# EAGLE board SurgicalPCB (EAGLE 6.3)
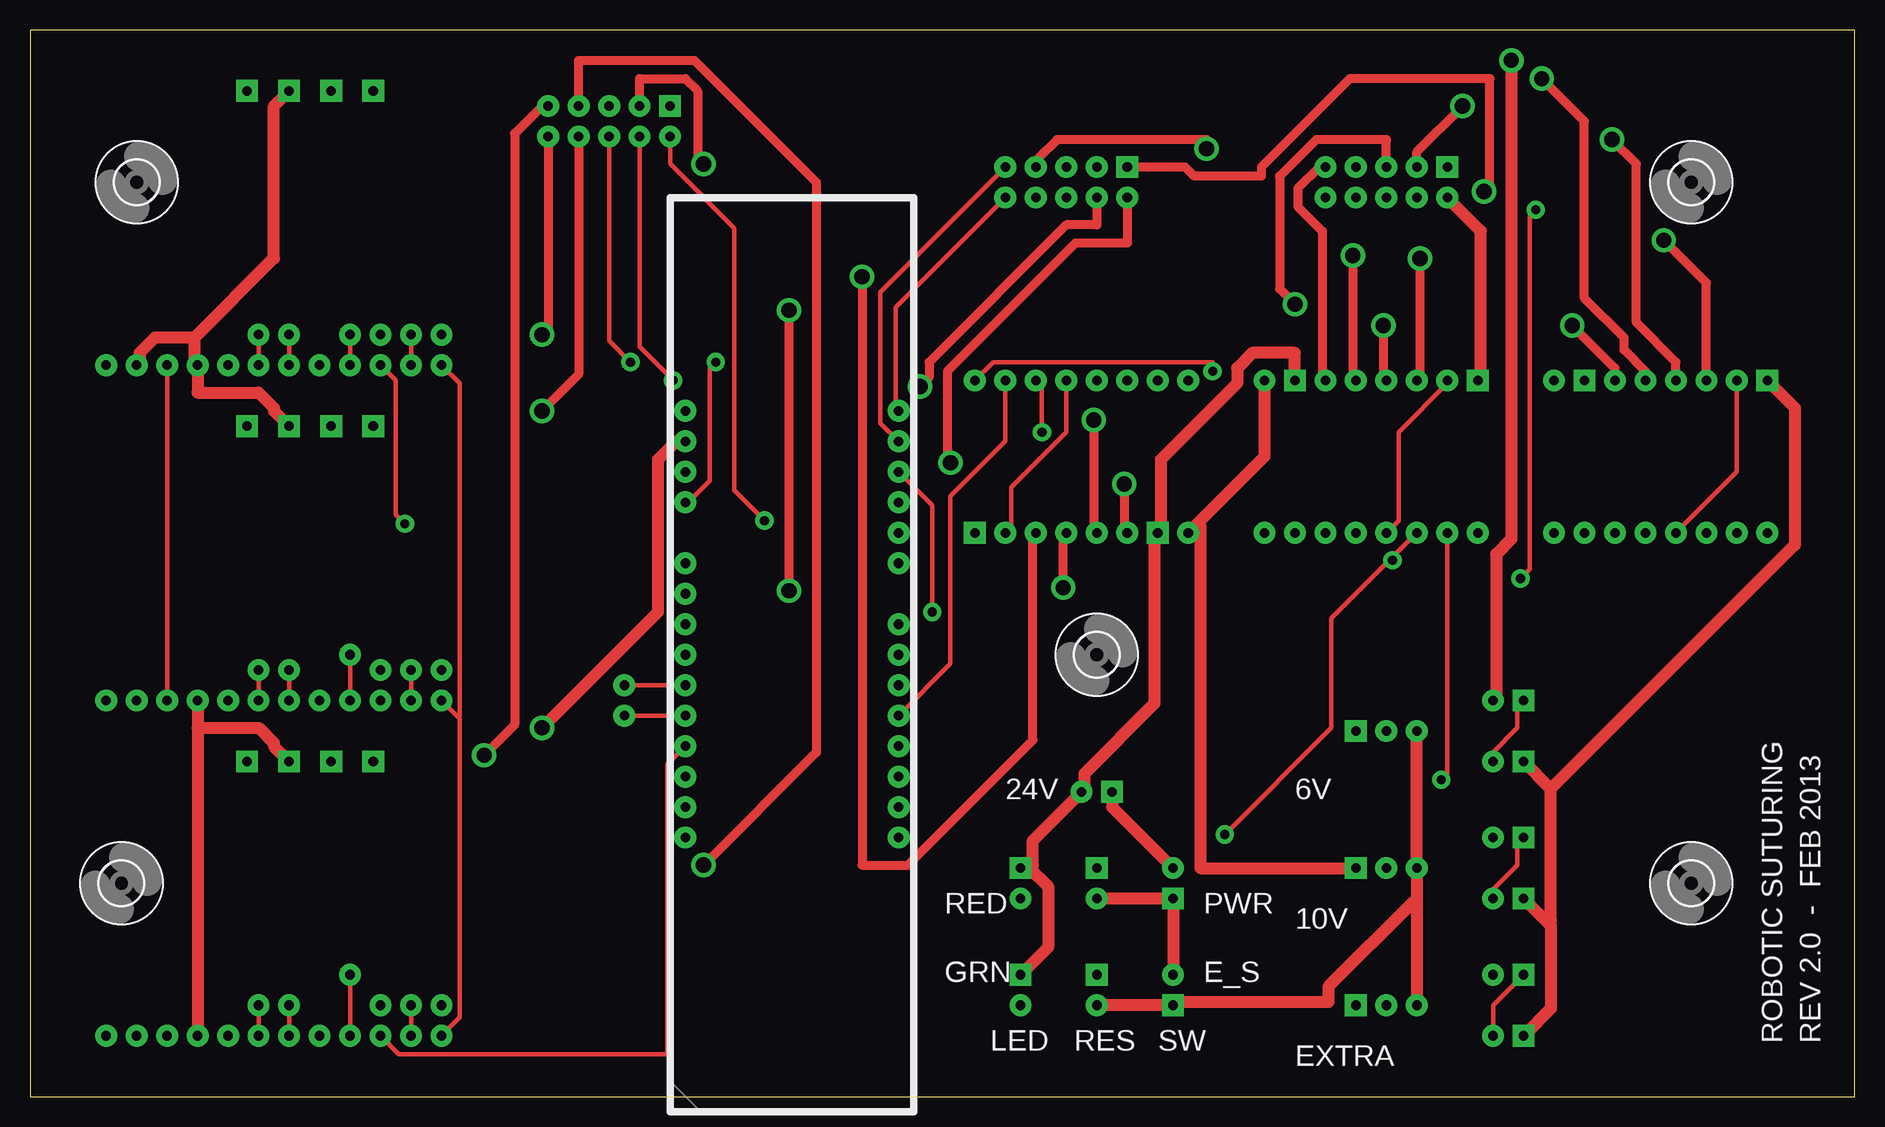
[diagram p0: board, top side]
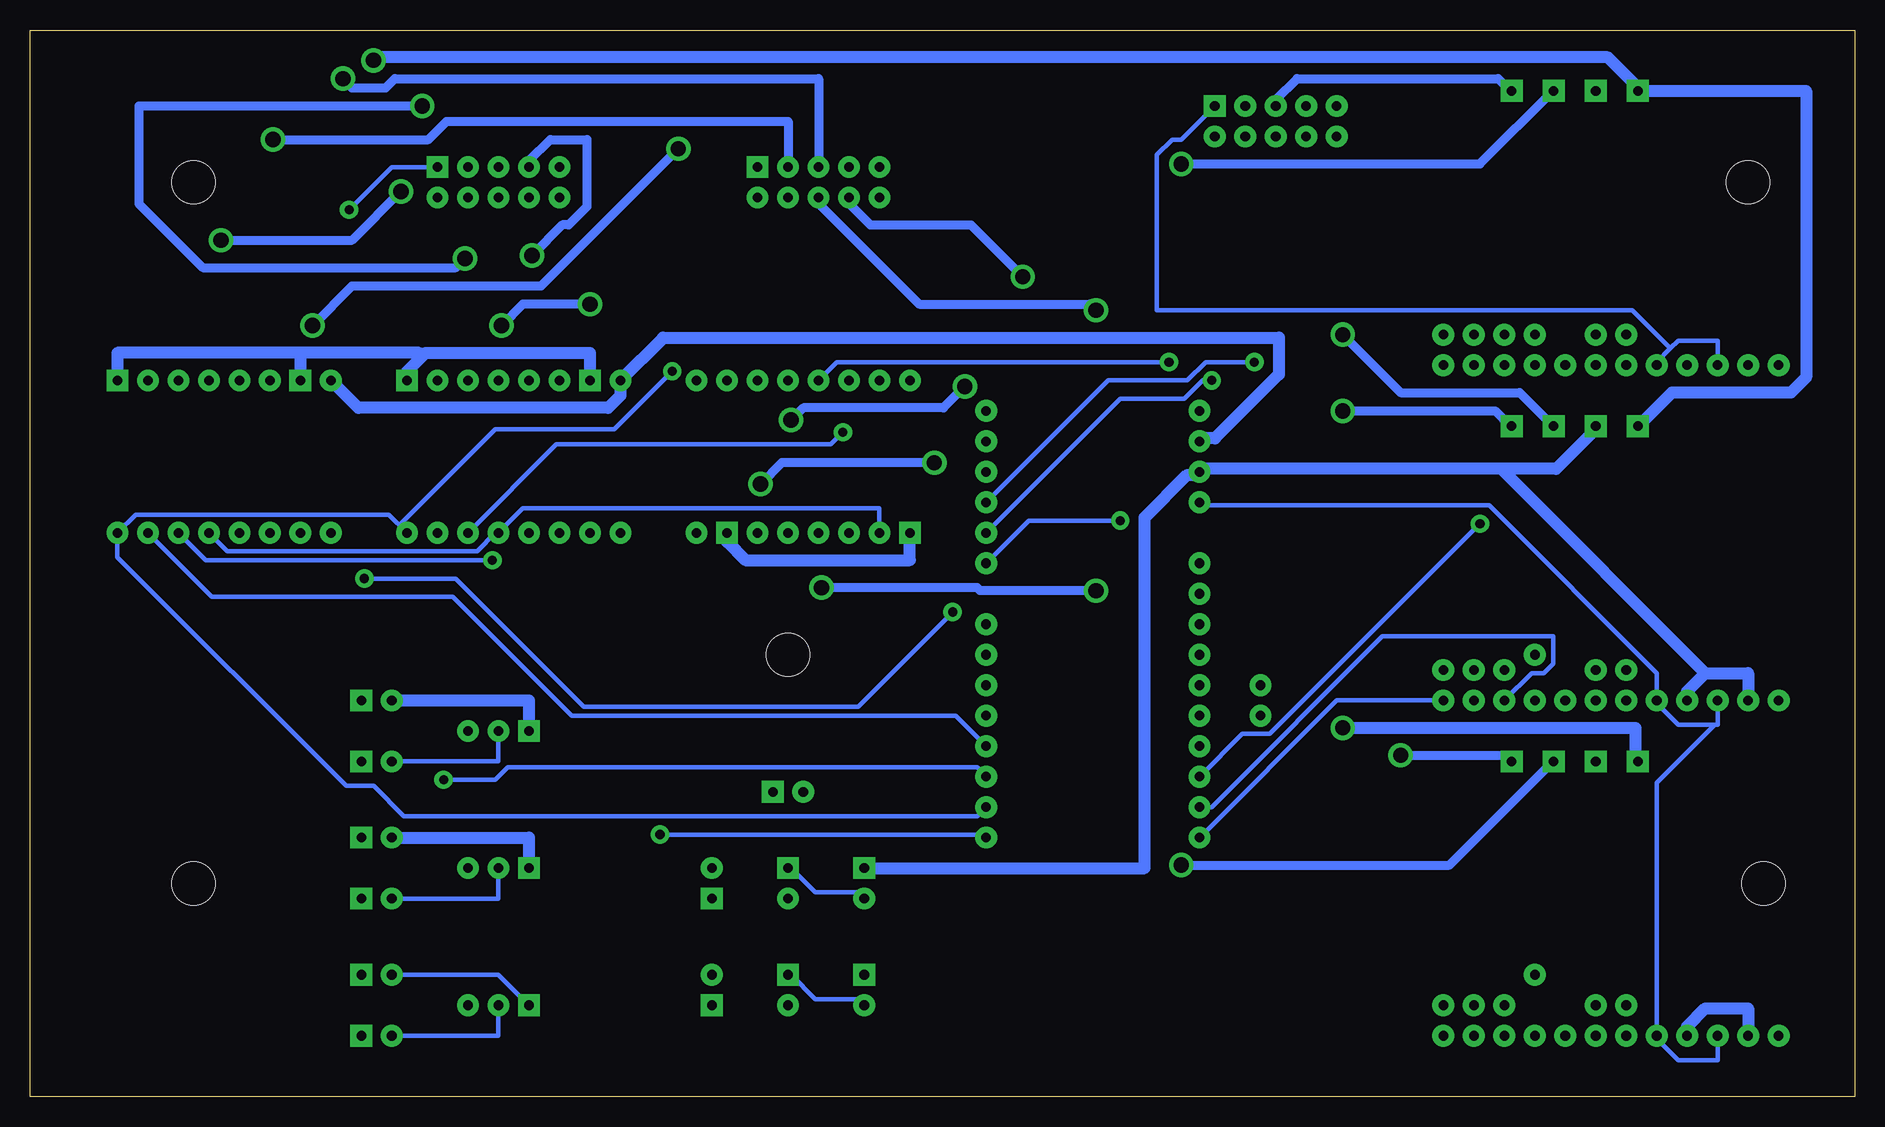
[diagram p1: board, bottom side, seen from below]

Size 152.07 x 88.89 mm. Coordinates in mm from the lower left corner, seen from the top.
Outline: 0,0 152.07,0 152.07,88.89 0,88.89 0,0
Copper layers (1*16): Top 0.035mm / dielectric 1.5mm / Bottom 0.035mm
Design rules "default *": minimum track width 15mil, minimum drill 10mil, track to track 15mil, track to pad 15mil, pad to pad 15mil, via to via 15mil, smd to smd 8mil, copper to edge 40mil, drill to drill 8mil, minimum pad ring 20mil, minimum via ring 15mil, stop-mask expansion 4mil, vias tented up to drill 0mil, thermal gap 10mil
Net classes: 0 default: width 0.381 mm, drill 0.762 mm, clearance 0.381 mm; 1 Power: width 1.016 mm, drill 1.27 mm, clearance 0.381 mm; 2 Motor: width 0.762 mm, drill 1.27 mm, clearance 0.381 mm

## Footprints (pad centres in the part's own frame; a part is rotated, then mirrored left to right if it is on the bottom)
V_REG = drill 0.8: ADJ 0,0; VIN 0,2.54 | drill 0.8 square: VOUT 0,-2.54
RESISTOR = drill 0.8: VIN 0,1.27 | drill 0.8 square: VOUT 0,-1.27
A4955 = drill 0.8: 1A 6.35,-1.27; 1B 6.35,-3.81; 2A 6.35,1.27; 2B 6.35,3.81; !EN -6.35,8.89; !RST -6.35,-1.27; !SLP -6.35,-3.81; DIT -6.35,-8.89; MS1 -6.35,6.35; MS2 -6.35,3.81; MS3 -6.35,1.27; STEP -6.35,-6.35; VDD 6.35,-6.35; VMOT 6.35,8.89 | drill 0.8 square: GND 6.35,6.35; GND_2 6.35,-8.89
BOARDUINO = drill 0.8: 5V 8.89,-2.54; 5V_2 8.89,-10.16; 10 -8.89,12.7; 11 -8.89,10.16; 12 -8.89,7.62; 13 -8.89,5.08; A0 -8.89,-5.08; A1 -8.89,-7.62; A2 -8.89,-10.16; A3 -8.89,-12.7; A4 -8.89,-15.24; A5 -8.89,-17.78; AREF -8.89,0; D2 8.89,5.08; D3 8.89,7.62; D4 8.89,10.16; D5 8.89,12.7; D6 8.89,15.24; D7 8.89,17.78; D8 -8.89,17.78; D9 -8.89,15.24; GND -8.89,2.54; GND_2 8.89,-5.08; GND_3 8.89,-12.7; RESET 8.89,-17.78; RX 8.89,0; TX 8.89,2.54; VIN 8.89,-15.24
MC33926 = drill 0.8: EN -11.43,-7.62; FB -11.43,-5.08; GND -11.43,12.7; IN1 -11.43,5.08; IN2 -11.43,7.62; INV -11.43,-12.7; JP_EN -8.89,-7.62; JP_INV -8.89,-12.7; JP_PWM/D1 -8.89,0; JP_PWM/D2 -8.89,2.54; JP_SLEW -8.89,-10.16; PWM/D1 -11.43,0; PWN/D2 -11.43,2.54; SF -11.43,-2.54; SLEW -11.43,-10.16; VDD -11.43,10.16; VIN -11.43,15.24 | drill 0.8 square: M_GND 11.43,0; M_OUT1 11.43,-7.01; M_OUT2 11.43,-3.505; M_VIN 11.43,3.505
2_5_RIBBON = drill 0.8 square: 1 -1.27,5.08 | drill 0.8: 2 1.27,5.08; 3 -1.27,2.54; 4 1.27,2.54; 5 -1.27,0; 6 1.27,0; 7 -1.27,-2.54; 8 1.27,-2.54; 9 -1.27,-5.08; 10 1.27,-5.08
3,6 = hole 3.6: 0,0
PROPE_HOLE = drill 0.8: P$1 0,0

## Placement (x,y rotation side)
6V  V_REG  [V_REG]  113.03,30.48 270 top
10V  V_REG  [V_REG]  113.03,19.05 270 top
E_STOP  RESISTOR  [RESISTOR]  95.25,8.89 0 top
EV  V_REG  [V_REG]  113.03,7.62 270 top
LED_GREEN  RESISTOR  [RESISTOR]  82.55,8.89 180 top
LED_R  RESISTOR  [RESISTOR]  82.55,17.78 180 top
LED_RES  RESISTOR  [RESISTOR]  88.9,17.78 180 top
LED_RES_G  RESISTOR  [RESISTOR]  88.9,8.89 180 top
POWER_SWITCH  RESISTOR  [RESISTOR]  95.25,17.78 0 top
POWERPLUG  RESISTOR  [RESISTOR]  88.9,25.4 90 top
RES6-1  RESISTOR  [RESISTOR]  123.19,33.02 90 top
RES_6-2  RESISTOR  [RESISTOR]  123.19,27.94 90 top
RES_10-1  RESISTOR  [RESISTOR]  123.19,21.59 90 top
RES_10-2  RESISTOR  [RESISTOR]  123.19,16.51 90 top
RES_EV-1  RESISTOR  [RESISTOR]  123.19,10.16 90 top
RES_EV-2  RESISTOR  [RESISTOR]  123.19,5.08 90 top
U$1  A4955  [A4955]  111.76,53.34 90 top
U$2  A4955  [A4955]  135.89,53.34 90 top
U$3  A4955  [A4955]  87.63,53.34 270 top
U$4  BOARDUINOSTD  [BOARDUINO]  63.5,39.37 180 top
U$5  MC33926  [MC33926]  21.59,44.45 90 top
U$6  MC33926  [MC33926]  21.59,72.39 90 top
U$7  MC33926  [MC33926]  21.59,16.51 90 top
U$8  2_5_RIBBON  [2_5_RIBBON]  48.26,81.28 270 top
U$9  2_5_RIBBON  [2_5_RIBBON]  113.03,76.2 270 top
U$10  2_5_RIBBON  [2_5_RIBBON]  86.36,76.2 270 top
U$11  [3,6]  8.89,76.2 0 top
U$13  [3,6]  7.62,17.78 0 top
U$14  PROPE_HOLE  [PROPE_HOLE]  26.67,10.16 0 top
U$15  [3,6]  138.43,17.78 0 top
U$16  [3,6]  138.43,76.2 0 top
U$17  [3,6]  88.9,36.83 0 top
U$23  PROPE_HOLE  [PROPE_HOLE]  26.67,63.5 0 top
U$24  PROPE_HOLE  [PROPE_HOLE]  26.67,36.83 0 top
U$25  PROPE_HOLE  [PROPE_HOLE]  49.53,31.75 0 top
U$26  PROPE_HOLE  [PROPE_HOLE]  49.53,34.29 0 top

## Library data of the parts
6V 10V E_STOP EV LED_GREEN LED_R LED_RES LED_RES_G POWER_SWITCH POWERPLUG RES6-1 RES_6-2 RES_10-1 RES_10-2 RES_EV-1 RES_EV-2 U$5-U$10 U$14 U$23-U$26 = SURGICALv2
U$1-U$3 = A4955
U$4 = SURGICAL
U$11 U$13 U$15-U$17 = holes

## Nets
6V_RAIL [Power]: 6V.VOUT RES6-1.VIN U$5.M_VIN U$6.M_VIN
10V_RAIL [Power]: 10V.VOUT RES_10-1.VIN U$1.VMOT U$2.VMOT U$3.VMOT U$4.VIN U$7.M_VIN
24V_1 [Power]: POWER_SWITCH.VIN POWERPLUG.VOUT
24V_2 [Power]: E_STOP.VIN LED_RES.VIN POWER_SWITCH.VOUT
24V_3: LED_R.VIN LED_RES.VOUT
24V_4 [Power]: 6V.VIN 10V.VIN E_STOP.VOUT EV.VIN LED_RES_G.VIN
24V_5: LED_GREEN.VIN LED_RES_G.VOUT
GND [Power]: LED_GREEN.VOUT LED_R.VOUT POWERPLUG.VIN RES_6-2.VOUT RES_10-2.VOUT RES_EV-2.VOUT U$1.GND U$1.GND_2 U$2.GND U$2.GND_2 U$3.GND U$3.GND_2 U$4.GND_3 U$5.GND U$5.IN2 U$5.M_GND U$6.GND U$6.IN2 U$6.M_GND U$7.GND U$7.IN2 U$7.M_GND U$9.2
LOGIC_HIGH_RAIL: U$1.!RST U$1.VDD U$2.!RST U$2.VDD U$3.!RST U$3.VDD U$4.5V_2 U$5.IN1 U$5.VDD U$6.IN1 U$6.VDD U$7.IN1 U$7.VDD U$8.1
N$1: U$3.STEP U$4.12
N$2: U$1.!SLP U$2.!SLP U$3.!SLP U$4.D8
N$3: U$1.DIT U$2.DIT U$3.DIT U$4.D9
N$4: U$1.STEP U$4.10
N$5: U$2.STEP U$4.11
N$6: U$7.FB U$14.P$1
N$7: U$6.FB U$23.P$1
N$9: U$5.JP_PWM/D2 U$5.PWN/D2
N$10: U$5.JP_PWM/D1 U$5.PWM/D1
N$11: U$5.JP_SLEW U$5.SLEW
N$12: U$5.FB U$24.P$1
N$13: U$4.D3 U$25.P$1
N$14: U$6.JP_PWM/D2 U$6.PWN/D2
N$15: U$6.JP_PWM/D1 U$6.PWM/D1
N$16: U$6.JP_SLEW U$6.SLEW
N$17: U$4.D2 U$26.P$1
N$19: U$7.JP_PWM/D2 U$7.PWN/D2
N$20: U$7.JP_PWM/D1 U$7.PWM/D1
N$21: U$7.JP_SLEW U$7.SLEW
N$22: U$4.D7 U$5.INV U$6.INV U$7.INV
N$23 [Motor]: U$5.M_OUT2 U$8.10
N$24: U$4.D6 U$5.EN
N$25: U$4.D5 U$6.EN
N$26: U$4.D4 U$7.EN
N$27 [Motor]: U$5.M_OUT1 U$8.8
N$28 [Motor]: U$6.M_OUT2 U$8.3
N$29 [Motor]: U$6.M_OUT1 U$8.5
N$30 [Motor]: U$7.M_OUT2 U$8.7
N$31 [Motor]: U$7.M_OUT1 U$8.9
N$32: U$4.A2 U$8.6
N$33: U$4.A1 U$8.4
N$34: U$4.A0 U$8.2
N$35 [Motor]: U$3.2B U$10.2
N$36 [Motor]: U$3.2A U$10.4
N$37 [Motor]: U$3.1A U$10.6
N$38 [Motor]: U$3.1B U$10.8
N$39: U$4.A5 U$10.10
N$40 [Motor]: U$2.1B U$10.1
N$41 [Motor]: U$2.1A U$10.3
N$42 [Motor]: U$2.2A U$10.5
N$43 [Motor]: U$2.2B U$10.7
N$44: U$4.A4 U$10.9
N$45 [Motor]: U$1.2B U$9.9
N$46 [Motor]: U$1.2A U$9.7
N$47 [Motor]: U$1.1A U$9.5
N$48 [Motor]: U$1.1B U$9.3
N$49: U$4.A3 U$9.1
N$52: 10V.ADJ RES_10-1.VOUT RES_10-2.VIN
N$60: 6V.ADJ RES6-1.VOUT RES_6-2.VIN
N$64: EV.VOUT RES_EV-1.VIN
N$65: EV.ADJ RES_EV-1.VOUT RES_EV-2.VIN

## Tracks (layer width: path | path; a pad name or v marks a point on that pad's centre or on a via)
6V_RAIL  (via drill 1.27)
  Top 1.016: RES6-1.VIN 122.17,33.27 122.17,45.21 123.44,46.48 v123.44,86.36
  Bottom 1.016: 6V.VOUT 110.49,33.02 RES6-1.VIN | U$5.M_VIN 18.03,55.88 15.24,58.67 5.33,58.67 4.06,59.94 4.06,83.82 U$6.M_VIN 18.03,84.07 20.57,86.61 123.19,86.61 v123.44,86.36
10V_RAIL  (via drill 1.27)
  Top 1.016: v42.67,30.73 52.32,40.39 52.32,53.09 53.85,54.61 U$4.VIN | 97.28,47.75 102.87,53.34 U$1.VMOT | 97.28,47.75 U$3.VMOT | 10V.VOUT 97.54,19.05 97.54,47.5 97.28,47.75
  Bottom 1.016: v42.67,30.73 18.29,30.73 18.29,27.94 U$7.M_VIN | 10V.VOUT 110.49,21.59 RES_10-1.VIN | U$2.VMOT 124.71,57.4 103.89,57.4 102.87,58.42 U$1.VMOT 99.31,63.25 48.01,63.25 48.01,60.2 53.34,54.86 54.36,54.86 U$4.VIN
24V_1
  Top 1.016: POWER_SWITCH.VIN 90.17,24.13 POWERPLUG.VOUT
24V_2
  Top 1.016: E_STOP.VIN POWER_SWITCH.VOUT LED_RES.VIN
24V_3
  Bottom 0.381: LED_R.VIN 83.06,17.02 86.61,17.02 88.65,19.05 LED_RES.VOUT
24V_4
  Top 1.016: LED_RES_G.VIN E_STOP.VOUT 95.5,7.87 108.2,7.87 108.2,9.14 115.32,16.26 115.57,16.26 | 115.57,16.26 10V.VIN 6V.VIN | 115.57,16.26 EV.VIN
24V_5
  Bottom 0.381: LED_GREEN.VIN 83.06,8.13 86.61,8.13 88.65,10.16 LED_RES_G.VOUT
GND
  Top 1.016: U$7.M_GND 20.32,29.21 20.32,29.46 19.05,30.73 13.97,30.73 | U$5.IN2 13.97,30.73 | 13.97,30.73 U$7.IN2 | U$5.M_GND 20.32,57.15 20.32,57.4 19.05,58.67 13.97,58.67 U$6.IN2 13.72,61.21 13.72,63.25 | U$6.GND 9.14,61.21 9.14,61.98 10.41,63.25 13.72,63.25 | U$6.M_GND 20.32,82.55 20.32,69.85 13.72,63.25 | LED_GREEN.VOUT 84.84,12.45 84.84,17.53 83.31,19.05 | LED_R.VOUT 83.31,19.05 | 83.31,19.05 83.57,19.3 83.57,21.34 POWERPLUG.VIN 87.88,25.65 87.88,26.92 93.73,32.77 93.73,46.74 U$3.GND 94.23,47.24 94.23,53.09 100.58,59.44 100.58,60.71 101.85,61.98 105.41,61.98 U$1.GND | RES_EV-2.VOUT 126.75,7.37 126.75,14.22 126.49,14.48 | RES_10-2.VOUT 126.49,14.48 | 126.75,25.65 RES_6-2.VOUT | 126.75,25.65 126.75,14.73 126.49,14.48 | U$9.2 120.9,72.14 120.9,59.94 U$1.GND_2 | 126.75,25.65 147.07,45.97 147.07,57.4 U$2.GND_2
  Bottom 1.016: U$7.GND 8.89,7.37 12.45,7.37 13.97,5.84 U$7.IN2 | U$5.GND 8.89,35.31 12.45,35.31 | 12.45,35.31 13.97,33.78 U$5.IN2 | 29.21,52.32 24.89,52.32 21.59,55.63 U$5.M_GND | 29.21,52.32 54.36,52.32 U$4.GND_3 54.86,51.82 55.63,51.82 59.18,48.26 59.18,19.05 LED_R.VOUT | 12.45,35.31 29.21,52.07 29.21,52.32 | U$3.GND_2 78.74,44.7 92.46,44.7 93.98,46.23 U$3.GND | U$1.GND 105.41,61.98 119.13,61.98 119.38,61.72 | 119.38,61.72 120.65,60.45 U$1.GND_2 | 129.54,61.98 U$2.GND | 129.54,61.98 119.63,61.98 119.38,61.72 | U$2.GND_2 144.78,61.98 129.54,61.98
LOGIC_HIGH_RAIL  (via drill 0.76)
  Top 0.381: U$2.!RST 142.24,52.07 U$2.VDD | U$3.VDD 81.79,47.5 81.79,50.8 86.36,55.37 U$3.!RST | U$1.!RST 114.05,48.01 114.05,55.37 118.11,59.44 U$1.VDD | U$5.VDD U$6.VDD | v57.15,61.21 56.64,60.71 56.64,51.31 54.86,49.53 U$4.5V_2
  Bottom 0.381: U$3.VDD 81.28,49.02 111,49.02 U$1.!RST 113.28,46.99 114.81,45.47 135.64,45.47 U$2.!RST | U$6.VDD 11.43,62.99 14.73,62.99 15.37,62.36 | 15.37,62.36 16.51,61.21 U$6.IN1 | U$8.1 56.13,79.76 56.9,79.76 58.17,78.49 58.17,65.53 18.54,65.53 15.37,62.36 | U$7.VDD 11.43,3.05 14.73,3.05 16.51,4.83 U$7.IN1 16.51,26.16 11.68,30.99 | U$5.VDD 11.43,30.99 11.68,30.99 | 11.68,30.99 14.73,30.99 16.51,32.77 U$5.IN1 16.51,35.31 30.48,49.28 54.36,49.28 U$4.5V_2 | U$3.!RST 84.84,61.21 v57.15,61.21
N$1
  Top 0.381: U$4.12 76.71,36.07 76.71,50.04 81.28,54.61 U$3.STEP
N$2  (via drill 0.76)
  Top 0.381: v99.57,21.84 108.46,30.73 108.46,39.88 113.41,44.83 | U$1.!SLP 113.41,44.83 | U$3.!SLP 84.33,59.18 v84.33,55.37 | v113.54,44.7 113.41,44.83
  Bottom 0.381: U$4.D8 72.64,21.84 v99.57,21.84 | v84.33,55.37 85.34,54.36 108.2,54.36 U$1.!SLP | U$2.!SLP 137.41,44.7 v113.54,44.7
N$3  (via drill 0.76)
  Top 0.381: U$3.DIT 80.26,61.21 98.55,61.21 v98.55,60.45
  Bottom 0.381: U$4.D9 73.15,23.37 120.9,23.37 123.44,25.91 125.73,25.91 144.78,44.96 U$2.DIT 143.26,48.51 122.17,48.51 U$1.DIT 121.16,47.75 113.28,55.63 103.38,55.63 v98.55,60.45
N$4  (via drill 0.76)
  Top 0.381: v117.6,26.42 118.11,26.92 U$1.STEP
  Bottom 0.381: U$4.10 73.15,27.43 112.27,27.43 113.28,26.42 v117.6,26.42
N$5
  Bottom 0.381: U$4.11 74.93,31.75 106.93,31.75 116.84,41.66 136.91,41.66 U$2.STEP
N$6
  Top 0.381: U$14.P$1 U$7.FB
N$7
  Top 0.381: U$23.P$1 U$6.FB
N$9
  Top 0.381: U$5.JP_PWM/D2 U$5.PWN/D2
N$10
  Top 0.381: U$5.JP_PWM/D1 U$5.PWM/D1
N$11
  Top 0.381: U$5.JP_SLEW U$5.SLEW
N$12
  Top 0.381: U$24.P$1 U$5.FB
N$13
  Top 0.381: U$4.D3 U$25.P$1
N$14
  Top 0.381: U$6.JP_PWM/D2 U$6.PWN/D2
N$15
  Top 0.381: U$6.JP_PWM/D1 U$6.PWM/D1
N$16
  Top 0.381: U$6.JP_SLEW U$6.SLEW
N$17
  Top 0.381: U$4.D2 U$26.P$1
N$19
  Top 0.381: U$7.JP_PWM/D2 U$7.PWN/D2
N$20
  Top 0.381: U$7.JP_PWM/D1 U$7.PWM/D1
N$21
  Top 0.381: U$7.JP_SLEW U$7.SLEW
N$22
  Top 0.381: U$7.INV 35.81,6.6 35.81,31.5 35.69,31.62 | U$5.INV 35.69,31.62 | U$6.INV 35.81,59.44 35.81,31.75 35.69,31.62
  Bottom 0.381: U$4.D7 43.18,33.02 U$5.INV
N$23  (via drill 1.27)
  Top 0.762: v42.67,63.5 43.18,64.01 U$8.10
  Bottom 0.762: v42.67,63.5 37.85,58.67 27.94,58.67 25.15,55.88 U$5.M_OUT2
N$24
  Bottom 0.381: U$5.EN 26.92,35.31 25.91,35.31 25.15,36.07 25.15,38.35 39.37,38.35 53.59,24.13 U$4.D6
N$25  (via drill 0.76)
  Top 0.381: v31.24,47.75 30.48,48.51 30.48,59.69 U$6.EN
  Bottom 0.381: U$4.D5 51.05,30.23 48.77,30.23 v31.24,47.75
N$26
  Top 0.381: U$7.EN 30.73,3.56 53.09,3.56 53.09,27.69 U$4.D4
N$27  (via drill 1.27)
  Top 0.762: v42.67,57.15 45.72,60.2 U$8.8
  Bottom 0.762: v42.67,57.15 29.97,57.15 28.7,55.88 U$5.M_OUT1
N$28  (via drill 1.27)
  Top 0.762: v56.13,77.72 55.63,78.23 55.63,83.82 54.61,84.84 50.8,84.84 U$8.3
  Bottom 0.762: v56.13,77.72 31.24,77.72 25.15,83.82 U$6.M_OUT2
N$29
  Bottom 0.762: U$8.5 48.26,83.06 46.48,84.84 29.72,84.84 28.7,83.82 U$6.M_OUT1
N$30  (via drill 1.27)
  Top 0.762: v56.13,19.3 65.53,28.7 65.53,76.2 55.37,86.36 45.72,86.36 U$8.7
  Bottom 0.762: v56.13,19.3 33.78,19.3 25.15,27.94 U$7.M_OUT2
N$31  (via drill 1.27)
  Top 0.762: v37.85,28.45 40.39,30.99 40.39,80.26 42.67,82.55 U$8.9
  Bottom 0.762: v37.85,28.45 29.21,28.45 28.7,27.94 U$7.M_OUT1
N$32  (via drill 0.76)
  Top 0.381: v50.04,61.21 48.26,62.99 U$8.6
  Bottom 0.381: U$4.A2 62.23,59.69 55.63,59.69 54.1,61.21 v50.04,61.21
N$33  (via drill 0.76)
  Top 0.381: v53.59,59.69 50.8,62.48 U$8.4
  Bottom 0.381: U$4.A1 61.21,58.17 55.88,58.17 54.36,59.69 v53.59,59.69
N$34  (via drill 0.76)
  Top 0.381: v61.21,48.01 58.67,50.55 58.67,72.39 53.34,77.72 U$8.2
  Bottom 0.381: U$4.A0 68.83,48.01 v61.21,48.01
N$35  (via drill 1.27)
  Top 0.762: U$3.2B 91.19,47.24 v91.19,51.05 | v76.71,52.83 76.45,53.09 76.45,60.45 87.12,71.12 91.44,71.12 U$10.2
  Bottom 0.762: v91.19,51.05 89.41,52.83 v76.71,52.83
N$36  (via drill 1.27)
  Top 0.762: U$3.2A 88.65,47.24 v88.65,56.39 | v74.17,59.18 74.93,59.94 74.93,61.21 86.36,72.64 88.9,72.64 U$10.4
  Bottom 0.762: v88.65,56.39 87.63,57.4 75.95,57.4 v74.17,59.18
N$37  (via drill 1.27)
  Top 0.762: U$3.1A 86.11,46.74 v86.11,42.42 | v63.25,65.53 v63.25,42.16
  Bottom 0.762: v86.11,42.42 73.15,42.42 72.9,42.16 v63.25,42.16 | v63.25,65.53 63.75,66.04 77.98,66.04 86.36,74.42 U$10.6
N$38  (via drill 1.27)
  Top 0.762: U$3.1B 83.57,46.74 83.57,29.72 73.15,19.3 69.34,19.3 v69.34,68.33
  Bottom 0.762: v69.34,68.33 73.66,72.64 82.04,72.64 83.82,74.42 U$10.8
N$39
  Top 0.381: U$4.A5 72.14,57.4 72.14,65.79 U$10.10
N$40  (via drill 1.27)
  Top 0.762: U$10.1 96.27,77.47 97.03,76.71 102.62,76.71 102.62,77.47 109.98,84.84 121.67,84.84 121.67,75.95 v121.16,75.44 | v136.14,71.37 139.7,67.82 U$2.1B
  Bottom 0.762: v121.16,75.44 125.22,71.37 v136.14,71.37
N$41  (via drill 1.27)
  Top 0.762: v131.83,79.76 133.86,77.72 133.86,64.52 137.16,61.21 U$2.1A
  Bottom 0.762: U$10.3 88.9,81.28 117.35,81.28 118.87,79.76 v131.83,79.76
N$42  (via drill 1.27)
  Top 0.762: v125.98,84.84 129.54,81.28 129.54,66.55 132.84,63.25 132.84,62.23 134.62,60.45 U$2.2A
  Bottom 0.762: U$10.5 86.36,84.84 121.67,84.84 122.43,84.07 125.22,84.07 v125.98,84.84
N$43  (via drill 1.27)
  Top 0.762: U$10.7 84.07,77.72 84.07,78.23 85.6,79.76 98.04,79.76 v98.04,78.99 | v128.52,64.26 132.08,60.71 U$2.2B
  Bottom 0.762: v98.04,78.99 109.47,67.56 125.22,67.56 v128.52,64.26
N$44
  Top 0.381: U$4.A4 70.87,56.13 70.87,67.06 U$10.9
N$45
  Top 0.762: U$1.2B 107.7,59.94 107.7,72.14 105.66,74.17 105.66,75.69 107.44,77.47 U$9.9
N$46  (via drill 1.27)
  Top 0.762: U$1.2A 110.24,59.94 v110.24,70.1
  Bottom 0.762: v110.24,70.1 107.7,72.64 107.19,72.64 105.66,74.17 105.66,79.76 108.71,79.76 110.49,77.98 U$9.7
N$47  (via drill 1.27)
  Top 0.762: U$1.1A 112.78,59.94 v112.78,64.26 | v105.41,66.04 104.14,67.31 104.14,76.71 107.19,79.76 113.03,79.76 U$9.5
  Bottom 0.762: v112.78,64.26 111,66.04 v105.41,66.04
N$48  (via drill 1.27)
  Top 0.762: U$1.1B 115.82,59.94 v115.82,69.85 | v119.38,82.55 115.57,78.74 U$9.3
  Bottom 0.762: v115.82,69.85 116.59,69.09 137.67,69.09 143,74.42 143,82.55 v119.38,82.55
N$49  (via drill 0.76)
  Top 0.381: U$4.A3 75.18,49.28 v75.18,40.39 | v124.21,43.18 124.97,43.94 124.97,73.41 v125.48,73.91
  Bottom 0.381: v75.18,40.39 83.06,32.51 105.92,32.51 116.59,43.18 v124.21,43.18 | v125.48,73.91 121.92,77.47 U$9.1
N$52
  Top 0.381: RES_10-1.VOUT 123.95,21.08 123.95,19.3 121.92,17.27 RES_10-2.VIN
  Bottom 0.381: 10V.ADJ 113.03,16.51 RES_10-2.VIN
N$60
  Top 0.381: RES6-1.VOUT 123.95,32.51 123.95,30.73 121.92,28.7 RES_6-2.VIN
  Bottom 0.381: 6V.ADJ 113.03,27.94 RES_6-2.VIN
N$64
  Bottom 0.381: EV.VOUT 113.03,10.16 RES_EV-1.VIN
N$65
  Top 0.381: RES_EV-1.VOUT 121.92,7.62 RES_EV-2.VIN
  Bottom 0.381: EV.ADJ 113.03,5.08 RES_EV-2.VIN

## Text on the board
tNames: 24V | 6V | RED | PWR | 10V | GRN | E_S | LED | RES | SW | ROBOTIC SUTURING | REV 2.0 - FEB 2013 | EXTRA